# EAGLE board IPIX_V2 (EAGLE 7.6.0)
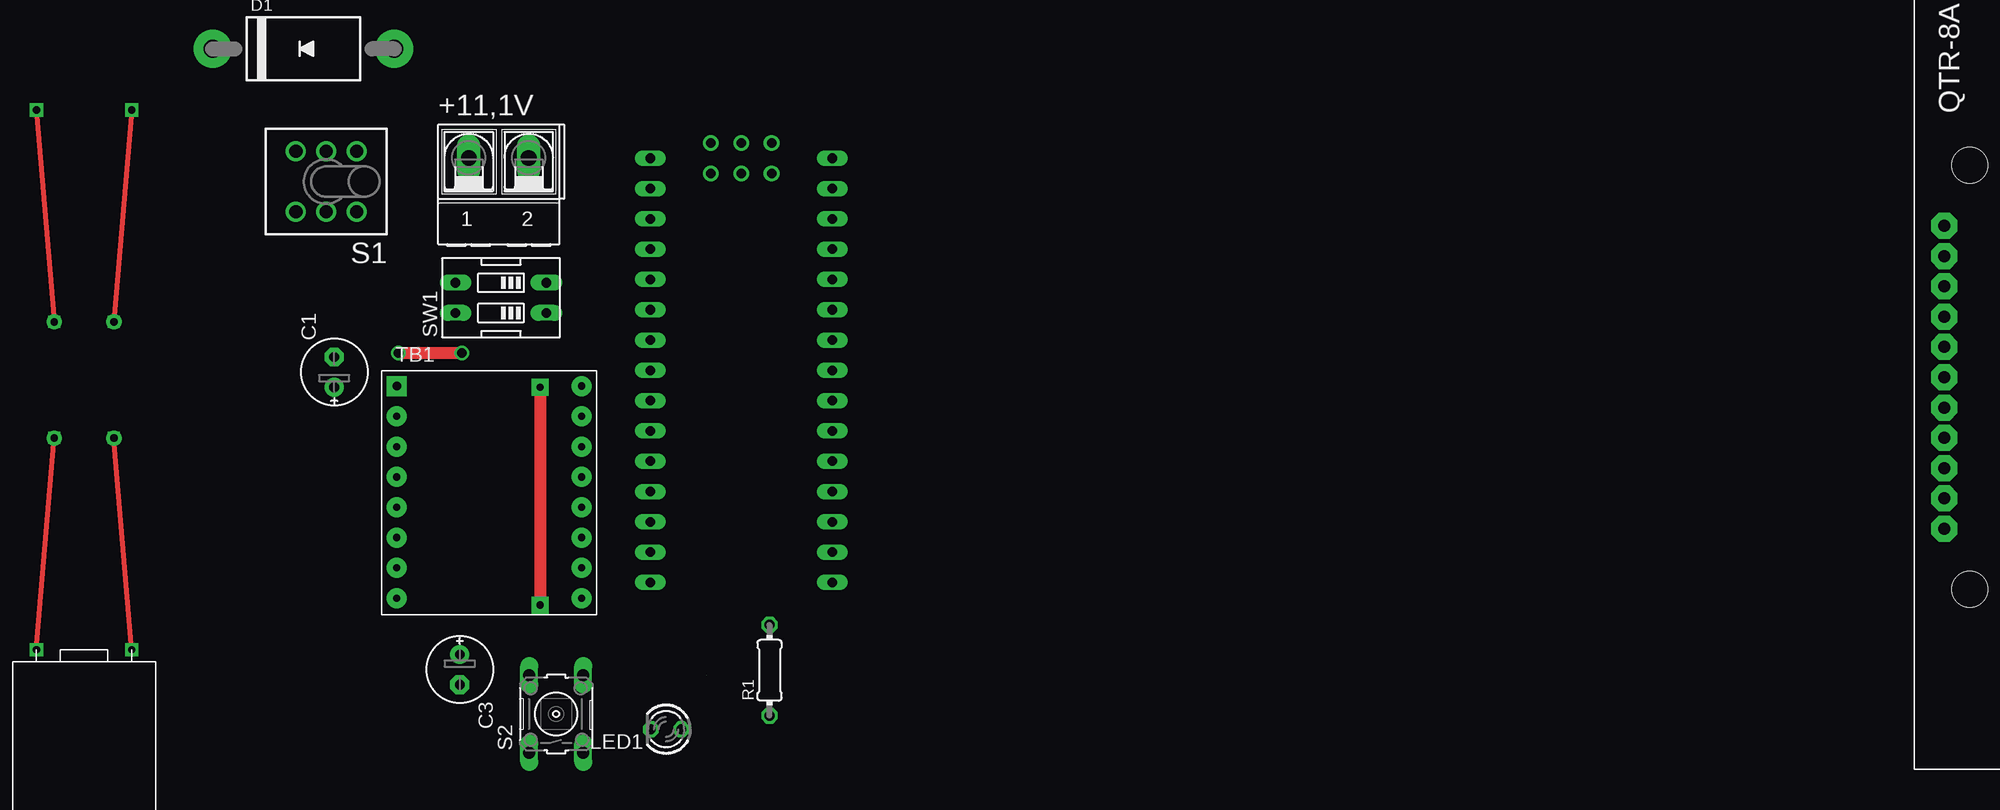
[diagram p0: board, top side]
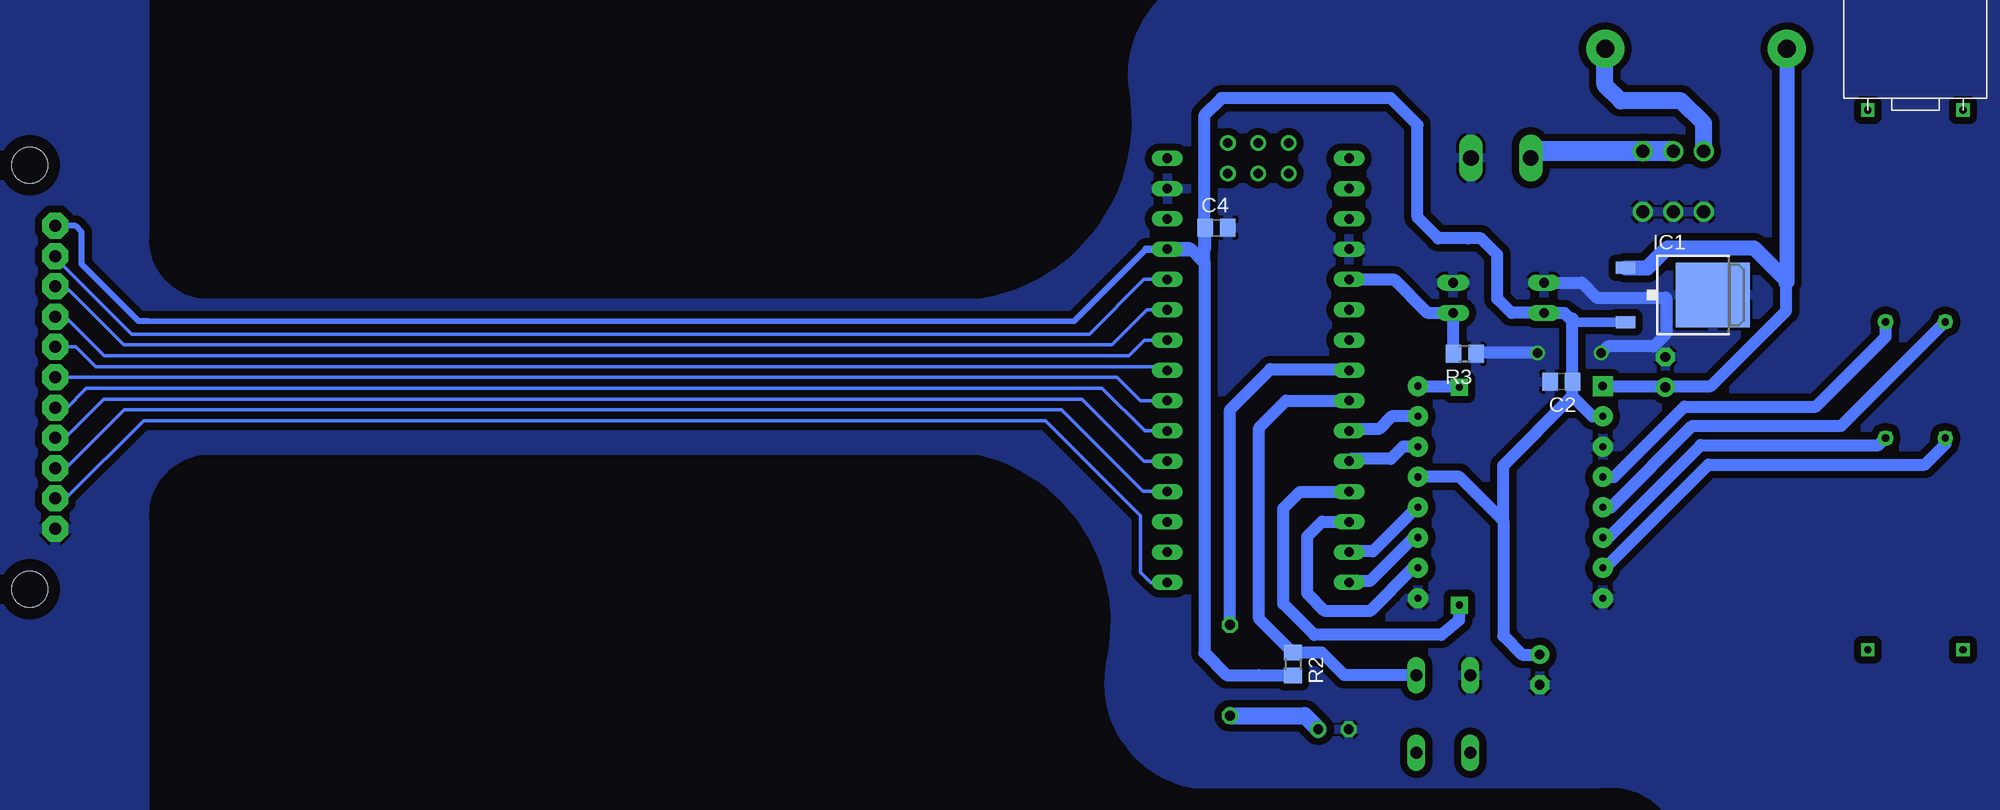
[diagram p1: board, bottom side, seen from below]

No outline drawn. Coordinates in mm, seen from the top.
Copper layers (1*16): Top 0.035mm / dielectric 1.5mm / Bottom 0.035mm
Design rules "default": minimum track width 10mil, minimum drill 24mil, track to track 8mil, track to pad 8mil, pad to pad 8mil, via to via 8mil, smd to smd 8mil, copper to edge 40mil, drill to drill 8mil, minimum pad ring 10mil, minimum via ring 8mil, stop-mask expansion 4mil, vias tented up to drill 0mil, thermal gap 10mil

## Footprints (pad centres in the part's own frame; a part is rotated, then mirrored left to right if it is on the bottom)
AK500/2-H = drill 1.321 long: 1 -2.515,0; 2 2.515,0
E2,5-6E = drill 0.813 pad 1.575: + -1.27,0 | drill 0.813 pad 1.575 octagon: - 1.27,0
C0805 = smd 1.3 x 1.5: 1 -0.95,0; 2 0.95,0
DO201AD = drill 1.499 pad 3.175: A 7.62,0; C -7.62,0
TO252 = smd 1 x 1.6: 1 -2.28,-4.8; 2 2.28,-4.8 | smd 5.4 x 6.2: 3 0,2.5
LED3MM = drill 0.813 octagon: A -1.27,0; K 1.27,0
0204/7 = drill 0.813 octagon: 1 -3.81,0; 2 3.81,0
R0805 = smd 1.3 x 1.5: 1 -0.95,0; 2 0.95,0
TL4XPO = drill 1.1 pad 1.676: 1 -2.54,2.54; 2 0,2.54; 3 2.54,2.54; 4 -2.54,-2.54; 5 0,-2.54; 6 2.54,-2.54
B3F-10XX = drill 1.016 long: 1 -3.251,2.261; 2 3.251,2.261; 3 -3.251,-2.261; 4 3.251,-2.261
EDG-02 = drill 0.813 long: 1 -1.27,-3.81; 2 1.27,-3.81; 3 1.27,3.81; 4 -1.27,3.81
TB6612FNG = drill 0.6 pad 1.676: A1 -7.62,-1.27; A2 -7.62,-3.81; AIN1 7.874,1.27; AIN2 7.874,3.81; B1 -7.62,-8.89; B2 -7.62,-6.35; BIN1 7.874,-3.81; BIN2 7.874,-6.35; GND1 -7.62,1.27; GND2 -7.62,-11.43; GND3 7.874,-11.43; PWMA 7.874,6.35; PWMB 7.874,-8.89; STBY 7.874,-1.27; VCC -7.62,3.81 | drill 0.7 pad 1.676 square: VM -7.62,6.35
NANO = drill 0.8 long: 3.3V -10.16,24.13; 5V -10.16,-1.27; A0 -10.16,19.05; A1 -10.16,16.51; A2 -10.16,13.97; A3 -10.16,11.43; A4 -10.16,8.89; A5 -10.16,6.35; A6 -10.16,3.81; A7 -10.16,1.27; AREF -10.16,21.59; D2 5.08,1.27; D3 5.08,3.81; D4 5.08,6.35; D5 5.08,8.89; D6 5.08,11.43; D7 5.08,13.97; D8 5.08,16.51; D9 5.08,19.05; D10 5.08,21.59; D11 5.08,24.13; D12 5.08,26.67; D13 -10.16,26.67; GND -10.16,-6.35; GND1 5.08,-1.27; RAW -10.16,-8.89; RST -10.16,-3.81; RST1 5.08,-3.81; RX1 5.08,-6.35; TX0 5.08,-8.89 | drill 0.8: ICSP1 -5.08,-10.16; ICSP2 -5.08,-7.62; ICSP3 -2.54,-10.16; ICSP4 -2.54,-7.62; ICSP5 0,-10.16; ICSP6 0,-7.62
QTR-8A = drill 1 pad 2.184 octagon: 3V3 -10.16,0; GND -12.7,0; LED1 -5.08,0; LED2 -2.54,0; LED3 0,0; LED4 2.54,0; LED5 5.08,0; LED6 7.62,0; LED7 10.16,0; LED8 12.7,0; LED_ON -7.62,0 | hole 3: 17.78,-2.12; -17.78,-2.12
MOTOR_N20 = drill 0.6 square: M1 2,-1; M2 10,-1

## Placement (x,y rotation side)
+11,1V  [AK500/2-H]  61.27,67.49 0 top
C1  10uF  [E2,5-6E]  47.47,49.53 90 top
C2  100nF  [C0805]  56.2,48.73 180 bottom
C3  10uF  [E2,5-6E]  58,24.59 270 top
C4  100nF  [C0805]  85.11,61.64 0 bottom
D1  [DO201AD]  44.89,76.64 0 top
IC1  7805DT  [TO252]  46,56 270 bottom
LED1  [LED3MM]  75.3,19.59 180 top
R1  560  [0204/7]  83.98,24.53 90 top
R2  10k  [R0805]  78.7,25.06 270 bottom
R3  10k  [R0805]  64.29,51.05 180 bottom
S1  TL46PO  [TL4XPO]  46.8,65.51 180 top
S2  [B3F-10XX]  66.09,20.87 90 top
SW1  [EDG-02]  61.46,55.76 90 top
TB1  TB6612FNG  [TB6612FNG]  60.34,42.01 0 top
U$1  NANO  [NANO]  79.07,58.57 180 top
U$2  QTR-8A  [QTR-8A]  182.5,49.1 90 top
U$3  MOTOR_N20  [MOTOR_N20]  32.5,72.5 0 bottom
U$4  MOTOR_N20  [MOTOR_N20]  32.5,25.25 180 top

## Library data of the parts
+11,1V = con-ptr500; OC_FARNELL: unknown; OC_NEWARK: unknown
C1 C3 = rcl
C2 C4 = eagle-ltspice; SPICEMODEL: NONE; SPICEPREFIX: C
D1 = diode (2)
IC1 = linear
LED1 = led
R1-R3 = eagle-ltspice; SPICEMODEL: NONE; SPICEPREFIX: R
S1 = switch
S2 = switch-omron; MPN: B3F-1000; OC_FARNELL: 176432; OC_NEWARK: 36M3542
SW1 = special
TB1 = TB6612FNG
U$1 = Arduino-clone
U$2 = QTR-8APINES; AVAILABILITY: Not in stock; CHECK_PRICES: https://www.snapeda.com/parts/QTR-8A/Pololu/view-part/?ref=eda; DESCRIPTION: QRE1113GR series Phototransistor Sensor Evaluation Board; MF: Pololu; MP: QTR-8A; PACKAGE: None; PRICE: None; SNAPEDA_LINK: https://www.snapeda.com/parts/QTR-8A/Pololu/view-part/?ref=snap
U$3 U$4 = Motor N20

## Nets
3,3V: U$1.3.3V
5V: C2.1 C3.+ C4.1 IC1.2 R2.2 SW1.4 TB1.STBY TB1.VCC U$1.5V U$2.LED8
A0: U$1.A0 U$2.LED_ON
A1: U$1.A1 U$2.LED1
A2: U$1.A2 U$2.LED2
A3: U$1.A3 U$2.LED3
A4: U$1.A4 U$2.LED4
A5: U$1.A5 U$2.LED5
A6: U$1.A6 U$2.LED6
A7: U$1.A7 U$2.LED7
D2: R3.2 SW1.1 U$1.D2
D3: U$1.D3
D4: U$1.D4
D5: R1.2 U$1.D5
D6: R2.1 S2.4 U$1.D6
D7: TB1.AIN2 U$1.D7
D8: TB1.AIN1 U$1.D8
D9: TB1.PWMA U$1.D9
D10: TB1.PWMB U$1.D10
D11: TB1.BIN1 U$1.D11
D12: TB1.BIN2 U$1.D12
D13: U$1.D13 U$2.3V3
GND: +11,1V.2 C1.- C2.2 C3.- C4.2 IC1.3 LED1.K R3.1 S1.1 S1.2 S1.3 S2.2 SW1.2 SW1.3 TB1.GND1 TB1.GND2 TB1.GND3 U$1.GND U$1.GND1 U$2.GND
N$2: D1.A S1.6
N$3: TB1.A2 U$3.M2
N$4: TB1.A1 U$3.M1
N$11: LED1.A R1.1
N$21: TB1.B2 U$4.M1
N$25: TB1.B1 U$4.M2
VCC: +11,1V.1 S1.4 S1.5
VM: C1.+ D1.C IC1.1 TB1.VM

## Tracks (layer width: path | path; a pad name or v marks a point on that pad's centre or on a via)
5V  (1 unrouted)
  Bottom 0.5: 91.01,59.85 97.03,53.83 174.73,53.81 175.5,53.81 180.27,58.58 180.27,61.27 180.79,61.79 U$2.LED8
  Bottom 0.61: 91.01,59.85 U$1.5V
  Bottom 0.813: IC1.2 55.17,53.72 55.69,54.24
  Bottom 1.016: TB1.VCC 53.57,45.82 55.25,47.5 | U$1.5V 89.32,59.75 87.16,59.75 86.12,58.71 86.12,25.99 84.26,24.13 81.58,24.13 78.69,24.11 | 61.06,37.06 64.75,40.75 TB1.STBY | 61.06,37.06 61.06,41.69 55.25,47.5 | U$1.5V 89.17,59.9 87.3,59.9 86.1,58.7 86.1,59.92 | 86.1,59.92 86.1,71.1 84.7,72.5 70.5,72.5 68.25,70.25 68.25,62.5 66.5,60.75 64,60.75 62.92,60.75 61.56,59.38 61.56,55.68 60.37,54.49 SW1.4 55.94,54.48 55.69,54.24 55.25,53.8 | 55.25,47.5 55.25,48.62 | 55.25,48.62 55.25,53.8 | 89.27,59.88 U$1.5V | 55.25,53.8 55.25,54.01 | C4.1 86.06,59.95 86.1,59.92 | C2.1 55.25,48.62 | 61.06,37.06 61.06,27.42 59.5,25.86 C3.+
A0
  Bottom 0.305: U$2.LED_ON 181.6,41.48 176.72,46.36 98.09,46.36 91.26,39.53 U$1.A0
A1
  Bottom 0.305: U$2.LED1 181.65,44.02 178.41,47.26 96.4,47.26 91.18,42.04 89.25,42.04 U$1.A1
A2
  Bottom 0.305: U$2.LED2 181.49,46.56 180.06,47.99 180.06,48 179.88,48.18 94.7,48.18 91.12,44.6 U$1.A2
A3
  Bottom 0.305: U$2.LED3 93.46,49.1 91.5,47.14 U$1.A3
A4
  Bottom 0.305: U$2.LED4 180.75,51.64 179.11,50 89.55,50 U$1.A4
A5
  Bottom 0.305: U$2.LED5 181.65,54.18 178.38,50.91 92.44,50.91 91.13,52.22 U$1.A5
A6
  Bottom 0.305: U$2.LED6 181.63,56.72 176.73,51.82 93.88,51.82 90.93,54.77 U$1.A6
A7
  Bottom 0.305: U$2.LED7 182.62,59.26 176.08,52.72 95.77,52.72 91.17,57.32 89.25,57.32 U$1.A7
D2
  Bottom 1.016: U$1.D2 70.25,57.3 67.46,54.51 65.29,54.51 SW1.1 65.24,54.46 R3.2
D5
  Bottom 1.016: R1.2 83.98,46.39 80.59,49.78 74.09,49.78 U$1.D5
D6
  Bottom 1.016: U$1.D6 79.28,47.13 81.54,44.87 81.54,28.85 R2.1 76.27,26 74.38,24.12 S2.4
D7
  Bottom 1.016: TB1.AIN2 70.43,45.82 71.5,44.75 73.84,44.75 U$1.D7
D8
  Bottom 1.016: TB1.AIN1 69.47,43.28 70.5,42.25 73.8,42.25 U$1.D8
D9  (via drill 0.6 pad 1.42)
  Top 1.016: v64.75,48.25 v64.75,30
  Bottom 1.016: v64.75,30 64.75,28.75 66.25,27.5 76.9,27.5 79.5,30.1 79.5,38.1 78.1,39.5 74.01,39.5 U$1.D9 | TB1.PWMA 64.86,48.36 v64.75,48.25
D10
  Bottom 1.016: TB1.PWMB 68.63,33.12 72.25,29.5 76,29.5 77.5,31 77.5,35.75 76.25,37 74.01,37 U$1.D10
D11
  Bottom 1.016: TB1.BIN1 68.3,38.2 72,34.5 73.93,34.5 U$1.D11
D12
  Bottom 1.016: TB1.BIN2 68.59,35.66 72.25,32 73.89,32 U$1.D12
D13
  Bottom 0.305: U$2.3V3 181.59,38.94 175.08,45.45 99.45,45.45 91.5,37.5 91.5,32.77 90.61,31.88 U$1.D13
GND  (via drill 0.8)
  Top 1.016: v52.85,51.14 v58.17,51.14
  Bottom 1.016: SW1.3 54.48,57.03 53.23,55.78 47.43,55.78 47.39,55.74 47.39,52.76 48.45,51.7 52.29,51.7 v52.85,51.14 | v58.17,51.14 63.25,51.14 R3.1
  pour Bottom (isolate 0.61): 38,0 14,0 arc-90 7,7 7,90 arc-90 15,98 38,98 arc-90 46,90 46,88 arc90 53,83 85,83 arc-90 92,72.9 arc90 105,55.29 170,55.29 arc90 175,61 175,88 arc-90 183,96 189,96 arc-90 196,88 196,9.75 arc-90 189,2.05 183,2.05 arc-90 175,9.75 175,37 arc90 170,43 105,43 arc90 94,25 arc-90 87,15 53,15 arc90 46,10 46,8 arc-90
N$2
  Bottom 1.422: S1.6 44.26,70.38 46.15,72.27 51.2,72.27 52.52,73.59 D1.A
N$3  (via drill 0.6)
  Top 0.406: U$3.M2 v24,53.73
  Bottom 1.016: 23.98,53.72 v24,53.73 32.72,45.02 45.19,45.02 52.01,38.2 TB1.A2
N$4  (via drill 0.6)
  Top 0.406: U$3.M1 v29,53.73
  Bottom 1.016: TB1.A1 51.76,40.74 45.87,46.63 34.85,46.63 29,52.48 v29,53.73
N$6  (via drill 0.6 pad 1.27)
  other vias: 29,44
N$7  (via drill 0.6 pad 1.27)
  other vias: 24,44
N$8  (via drill 0.6 pad 1.27)
  other vias: 29,53.75
N$9  (via drill 0.6 pad 1.27)
  other vias: 24,53.75
N$11
  Bottom 1.422: R1.1 77.71,20.72 LED1.A
N$21  (via drill 0.6)
  Top 0.406: U$4.M1 v29,44.02
  Bottom 1.016: TB1.B2 52.26,35.66 44.51,43.41 29.61,43.41 v29,44.02
N$25  (via drill 0.6)
  Top 0.406: U$4.M2 v24,44.02
  Bottom 1.016: TB1.B1 52.5,33.12 43.85,41.77 25.71,41.77 23.96,43.52 23.96,43.97 v24,44.02
VCC
  Bottom 1.676: S1.5 S1.4 58.2,68.05 +11,1V.1
VM
  Bottom 1.016: TB1.VM 47.58,48.36 | 47.58,48.36 C1.+ | 47.58,48.36 43.66,48.36 37.34,54.68 37.34,57 37.34,57.25
  Bottom 1.27: IC1.1 48.97,58.28 47.29,59.95 40.04,59.95 37.34,57.25 | D1.C 37.27,57.07 37.34,57